# EAGLE board gyro_pcb (EAGLE 7.5.0)
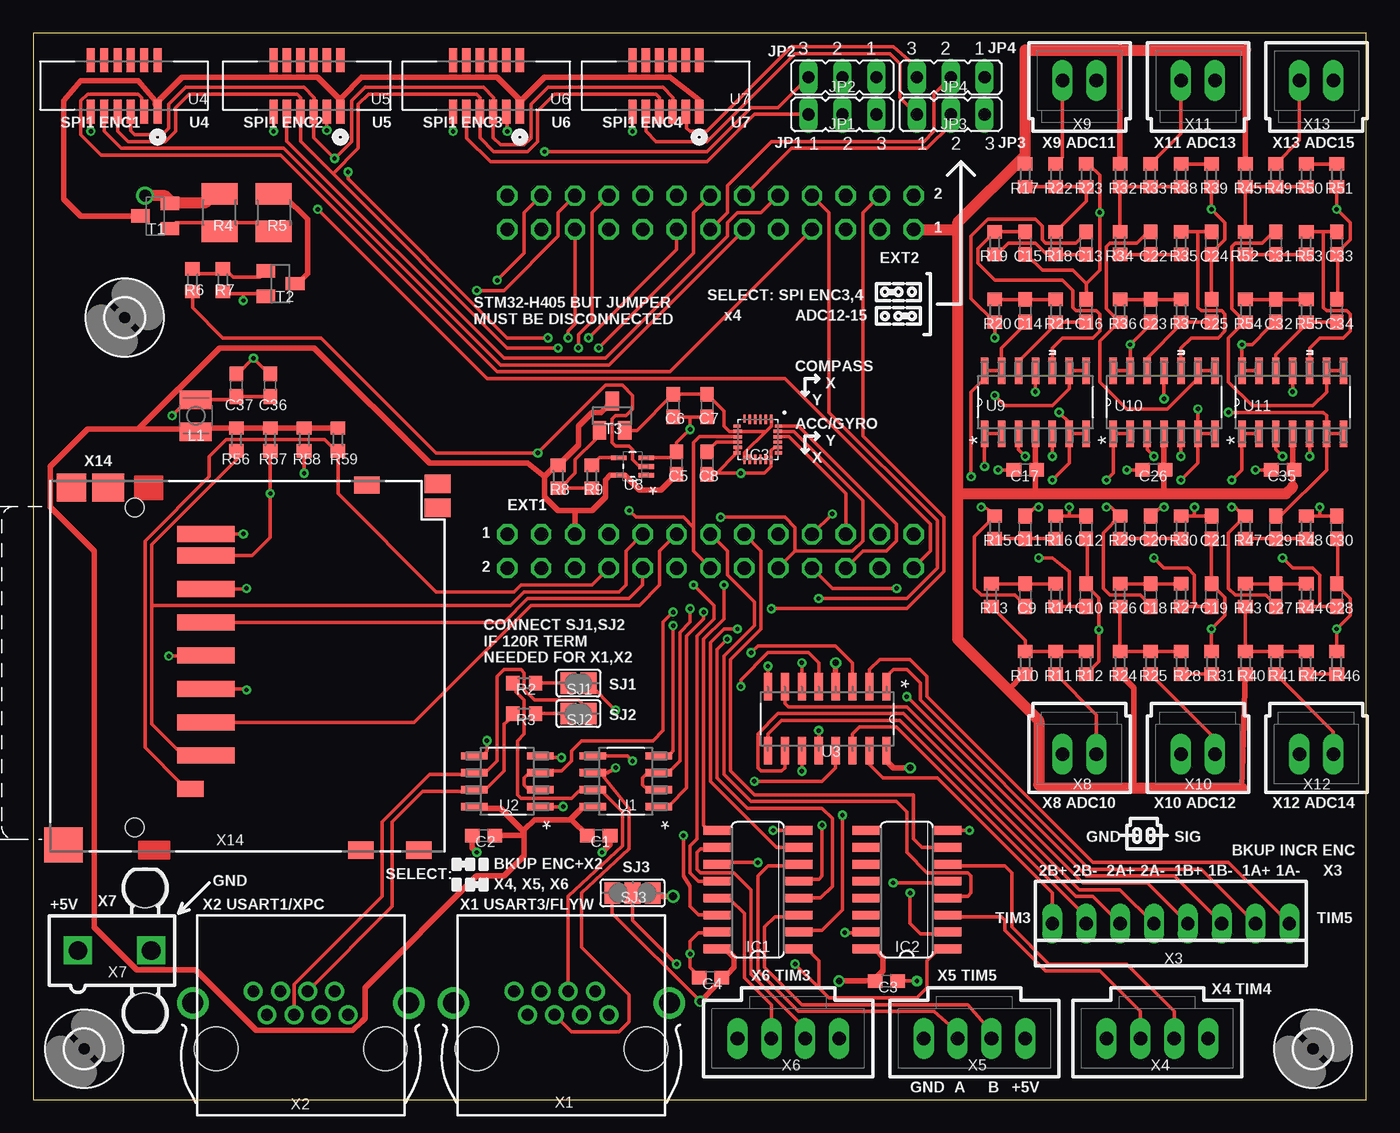
[diagram p0: board, top side]
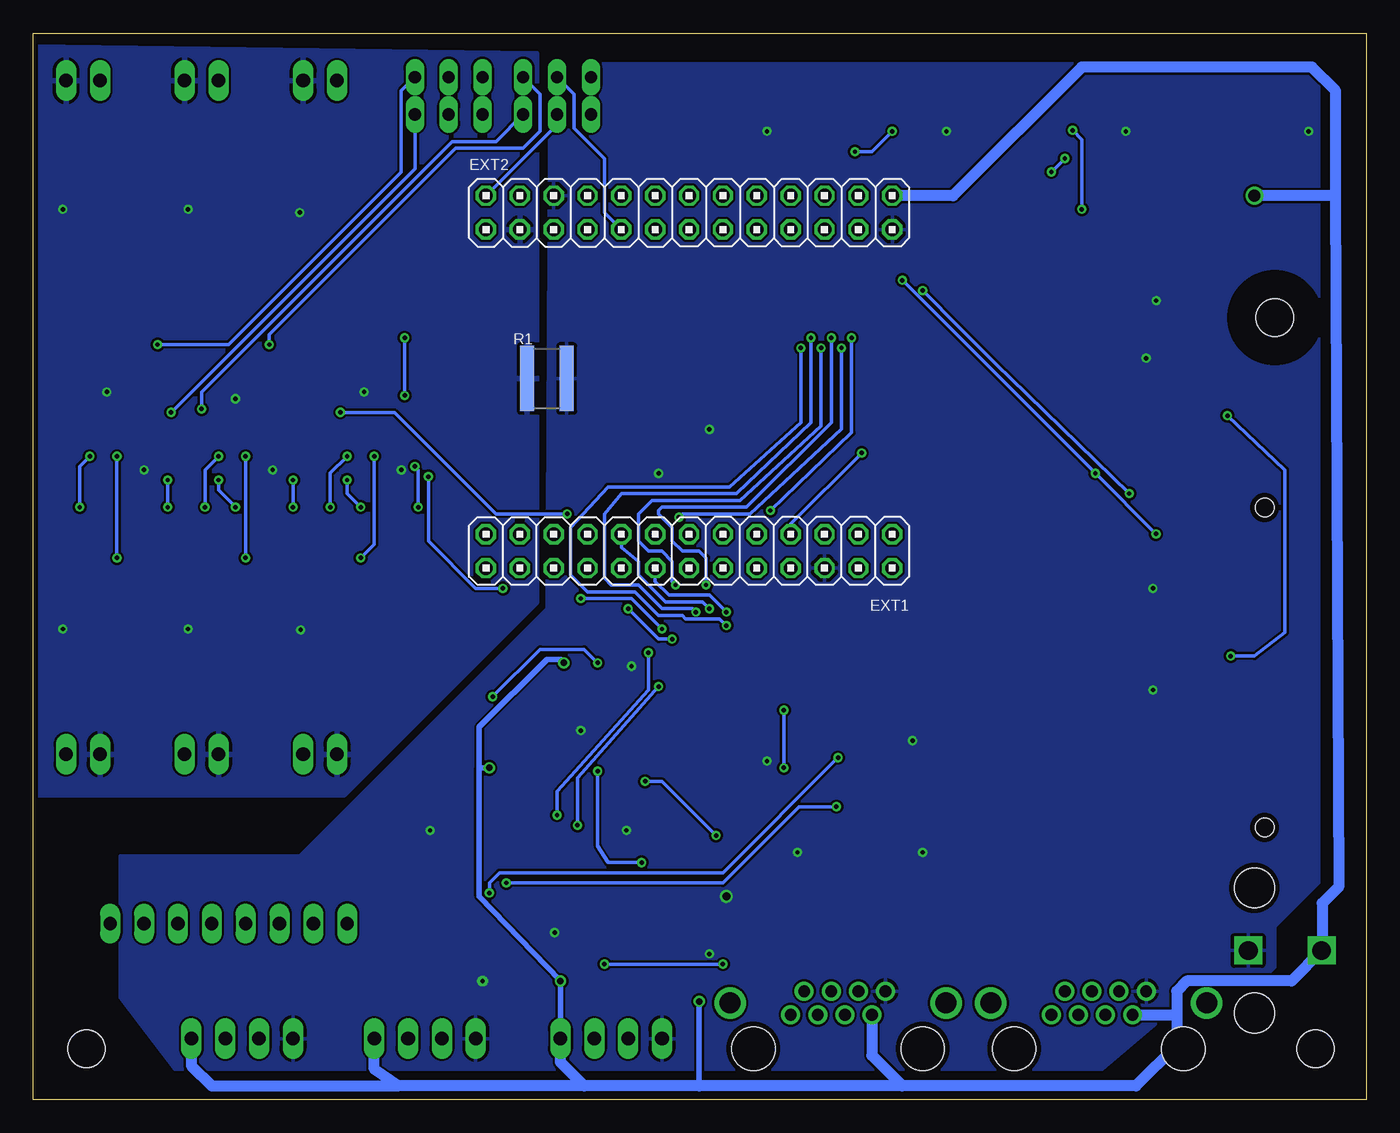
[diagram p1: board, bottom side, seen from below]

Size 100 x 80 mm. Coordinates in mm from the lower left corner, seen from the top.
Outline: 0,0 100,0 100,80 0,80 0,0
Copper layers (1*16): Top 0.0356mm / dielectric 1.5011mm / Bottom 0.0356mm
Design rules "default *": minimum track width 10mil, minimum drill 13mil, track to track 7mil, track to pad 5mil, pad to pad 5mil, via to via 5mil, smd to smd 5mil, copper to edge 15mil, drill to drill 6mil, minimum pad ring 7mil, minimum via ring 7mil, stop-mask expansion 4mil, vias tented up to drill 0mil, thermal gap 10mil

## Footprints (pad centres in the part's own frame; a part is rotated, then mirrored left to right if it is on the bottom)
C0603 = smd 1.1 x 1: 1 -0.85,0; 2 0.85,0
2X13 = drill 1.016 octagon: 1 -15.24,-1.27; 2 -15.24,1.27; 3 -12.7,-1.27; 4 -12.7,1.27; 5 -10.16,-1.27; 6 -10.16,1.27; 7 -7.62,-1.27; 8 -7.62,1.27; 9 -5.08,-1.27; 10 -5.08,1.27; 11 -2.54,-1.27; 12 -2.54,1.27; 13 0,-1.27; 14 0,1.27; 15 2.54,-1.27; 16 2.54,1.27; 17 5.08,-1.27; 18 5.08,1.27; 19 7.62,-1.27; 20 7.62,1.27; 21 10.16,-1.27; 22 10.16,1.27; 23 12.7,-1.27; 24 12.7,1.27; 25 15.24,-1.27; 26 15.24,1.27
2,8 = hole 2.8: 0,0
SO16 = smd 0.66 x 2.032: 1 -4.445,-3.073; 2 -3.175,-3.073; 3 -1.905,-3.073; 4 -0.635,-3.073; 5 0.635,-3.073; 6 1.905,-3.073; 7 3.175,-3.073; 8 4.445,-3.073; 9 4.445,3.073; 10 3.175,3.073; 11 1.905,3.073; 12 0.635,3.073; 13 -0.635,3.073; 14 -1.905,3.073; 15 -3.175,3.073; 16 -4.445,3.073
QFN24-SMALL = smd 0.6 x 0.25: 1 -1.55,1; 6 -1.55,-1; 13 1.55,-1; 18 1.55,1 | smd 0.7 x 0.25: 2 -1.5,0.6; 3 -1.5,0.2; 4 -1.5,-0.2; 5 -1.5,-0.6; 14 1.5,-0.6; 15 1.5,-0.2; 16 1.5,0.2; 17 1.5,0.6 | smd 0.25 x 0.6: 7 -1,-1.55; 12 1,-1.55; 19 1,1.55; 24 -1,1.55 | smd 0.25 x 0.7: 8 -0.6,-1.5; 9 -0.2,-1.5; 10 0.2,-1.5; 11 0.6,-1.5; 20 0.6,1.5; 21 0.2,1.5; 22 -0.2,1.5; 23 -0.6,1.5
JP2 = drill 0.914 long: 1 -2.54,0; 2 0,0; 3 2.54,0
L2825P = smd 1.4 x 2.4: 1 -1.2,0; 2 1.2,0
R1218 = smd 1.05 x 4.9: 1 -1.475,0; 2 1.475,0
R0603 = smd 1 x 1.1: 1 -0.85,0; 2 0.85,0
R1210 = smd 1.6 x 2.7: 1 -1.4,0; 2 1.4,0
SJ = smd 1.168 x 1.6: 1 -0.762,0; 2 0.762,0
SJ_2 = smd 1.168 x 1.6: 1 -1.524,0; 2 0,0; 3 1.524,0
SOT23-BEC = smd 1 x 1.4: B -0.95,-1.1; C 0,1.1; E 0.95,-1.1
SOT23 = smd 1 x 1.4: 1 -0.95,-1.1; 2 0.95,-1.1; 3 0,1.1
SOIC127P600X175-8N = smd 1.981 x 0.559: 1 -2.464,1.905; 2 -2.464,0.635; 3 -2.464,-0.635; 4 -2.464,-1.905; 5 2.464,-1.905; 6 2.464,-0.635; 7 2.464,0.635; 8 2.464,1.905
SOIC127P600X175-16N = smd 2.057 x 0.61: 1 -4.801,8.89; 2 -4.801,7.62; 3 -4.801,6.35; 4 -4.801,5.08; 5 -4.801,3.81; 6 -4.801,2.54; 7 -4.801,1.27; 8 -4.801,0; 9 0,0; 10 0,1.27; 11 0,2.54; 12 0,3.81; 13 0,5.08; 14 0,6.35; 15 0,7.62; 16 0,8.89
MOLEX_52610-0671 = smd 0.61 x 1.803: 1 -5.004,3.861; 2 -3.988,3.861; 3 -2.997,3.861; 4 -2.007,3.861; 5 -0.991,3.861; 6 0,3.861; 20 -5.004,0; 40 -3.988,0; 60 -2.997,0; 80 -2.007,0; 100 -0.991,0; 120 0,0
SOT65P210X110-5N = smd 1.168 x 0.356: 1 -1.041,0.66; 2 -1.041,0; 3 -1.041,-0.66; 4 1.041,-0.66; 5 1.041,0.66
SOIC127P600X175-14N = smd 1.981 x 0.559: 1 -2.362,3.81; 2 -2.362,2.54; 3 -2.362,1.27; 4 -2.362,0; 5 -2.362,-1.27; 6 -2.362,-2.54; 7 -2.362,-3.81; 8 2.362,-3.81; 9 2.362,-2.54; 10 2.362,-1.27; 11 2.362,0; 12 2.362,1.27; 13 2.362,2.54; 14 2.362,3.81
0446200002 = drill 0.889 pad 1.422: 1 3.556,2.54; 2 2.54,4.318; 3 1.524,2.54; 4 0.508,4.318; 5 -0.508,2.54; 6 -1.524,4.318; 7 -2.54,2.54; 8 -3.556,4.318 | drill 1.575 pad 2.286: S@1 -8.103,3.429; S@2 8.103,3.429 | hole 3.251: 6.35,0; -6.35,0
22-23-2081 = drill 1 long: 1 -8.89,0; 2 -6.35,0; 3 -3.81,0; 4 -1.27,0; 5 1.27,0; 6 3.81,0; 7 6.35,0; 8 8.89,0
70543-04 = drill 1.016 long: 1 -3.81,0; 2 -1.27,0; 3 1.27,0; 4 3.81,0
5566-2 = drill 1.4 square: 1 0,-2.75; 2 0,2.75 | hole 3: 4.7,2.29; -4.7,2.29
70543-02 = drill 1.016 long: 1 -1.27,0; 2 1.27,0
SDBMF-009XXBXX2 = smd 1.2 x 4.3: 1 6.7,5.325; 2 4.2,5.325; 3 1.7,5.325; 4 -0.8,5.325; 5 -3.3,5.325; 6 -5.8,5.325; 7 -8.3,5.325; 8 -9.925,5.325 | smd 1.2 x 2: 9 9.2,4.175 | smd 2.1 x 2.4: M1 -13.4,-2 | smd 2.6 x 2.9: M2 13.4,-5.35 | smd 1.3 x 1.9: M3 -13.6,17.4; M4 13.8,16.95; M5 13.8,21.3 | smd 1.4 x 1.95: SW1 -11.9,22.7; SW3 -13.7,22.7 | smd 2.1 x 2.2: SW2 -13.4,-4.75 | hole 1.4: -11.9,0; 12.1,0

## Placement (x,y rotation side)
C1  0.1uF  [C0603]  42.42,19.81 0 top
C2  0.1uF  [C0603]  33.78,19.81 180 top
C3  0.1uF  [C0603]  64.01,8.89 0 top
C4  0.1uF  [C0603]  50.8,9.14 180 top
C5  0.1uF  [C0603]  48.26,47.75 90 top
C6  0.1uF  [C0603]  48.01,52.07 270 top
C7  10nF  [C0603]  50.55,52.07 270 top
C8  0.1uF  [C0603]  50.55,47.75 270 top
C9  39nF  [C0603]  74.42,37.85 270 top
C10  33nF  [C0603]  78.99,37.85 90 top
C11  68nF  [C0603]  74.42,42.93 90 top
C12  10nF  [C0603]  78.99,42.93 270 top
C13  39nF  [C0603]  78.99,64.26 90 top
C14  68nF  [C0603]  74.42,59.18 270 top
C15  33nF  [C0603]  74.42,64.26 270 top
C16  10nF  [C0603]  78.99,59.18 90 top
C17  0.1uF  [C0603]  74.42,47.24 180 top
C18  39nF  [C0603]  83.82,37.85 270 top
C19  33nF  [C0603]  88.39,37.85 90 top
C20  68nF  [C0603]  83.82,42.93 90 top
C21  10nF  [C0603]  88.39,42.93 270 top
C22  39nF  [C0603]  83.82,64.26 90 top
C23  68nF  [C0603]  83.82,59.18 270 top
C24  33nF  [C0603]  88.39,64.26 270 top
C25  10nF  [C0603]  88.39,59.18 90 top
C26  0.1uF  [C0603]  84.07,47.24 180 top
C27  39nF  [C0603]  93.22,37.85 270 top
C28  33nF  [C0603]  97.79,37.85 90 top
C29  68nF  [C0603]  93.22,42.93 90 top
C30  10nF  [C0603]  97.79,42.93 270 top
C31  39nF  [C0603]  93.22,64.26 90 top
C32  68nF  [C0603]  93.22,59.18 270 top
C33  33nF  [C0603]  97.79,64.26 270 top
C34  10nF  [C0603]  97.79,59.18 90 top
C35  0.1uF  [C0603]  93.73,47.24 180 top
C36  22uF  [C0603]  17.78,53.59 90 top
C37  22uF  [C0603]  15.24,53.59 90 top
EXT1  [2X13]  50.8,41.15 180 bottom
EXT2  [2X13]  50.8,66.55 0 bottom
H1  MOUNT-HOLE2.8  [2,8]  3.81,3.81 0 top
H2  MOUNT-HOLE2.8  [2,8]  96.01,3.81 0 top
H3  MOUNT-HOLE2.8  [2,8]  6.86,58.67 0 top
IC1  74AC157D  [SO16]  54.36,15.75 90 top
IC2  74AC157D  [SO16]  65.53,15.75 90 top
IC3  MPU-9250  [QFN24-SMALL]  54.36,49.53 270 top
JP1  [JP2]  60.71,73.91 0 top
JP2  [JP2]  60.71,76.71 180 top
JP3  [JP2]  68.83,73.91 0 top
JP4  [JP2]  68.83,76.71 180 top
L1  CL460nH/2012/1.7R/250mA  [L2825P]  12.19,51.31 90 top
R1  0-ohm  [R1218]  61.47,54.1 0 bottom
R2  120  [R0603]  36.83,31.24 0 top
R3  120  [R0603]  36.83,28.96 0 top
R4  2.7k  [R1210]  13.97,66.55 90 top
R5  270  [R1210]  18.03,66.55 270 top
R6  18k  [R0603]  11.94,61.47 90 top
R7  180k  [R0603]  14.22,61.47 90 top
R8  620k  [R0603]  39.37,46.74 90 top
R9  62k  [R0603]  41.91,46.74 270 top
R10  8.2k/0.1%  [R0603]  74.42,32.77 270 top
R11  10k/0.1%  [R0603]  76.71,32.77 90 top
R12  47k/0.1%  [R0603]  78.99,32.77 90 top
R13  11k/0.1%  [R0603]  71.88,37.85 90 top
R14  11k/0.1%  [R0603]  76.71,37.85 270 top
R15  15k/0.1%  [R0603]  72.14,42.93 270 top
R16  15k/0.1%  [R0603]  76.71,42.93 90 top
R17  8.2k/0.1%  [R0603]  74.42,69.34 90 top
R18  11k/0.1%  [R0603]  76.71,64.26 270 top
R19  11k/0.1%  [R0603]  72.14,64.26 90 top
R20  15k/0.1%  [R0603]  72.14,59.18 90 top
R21  15k/0.1%  [R0603]  76.71,59.18 270 top
R22  10k/0.1%  [R0603]  76.71,69.34 270 top
R23  47k/0.1%  [R0603]  78.99,69.34 270 top
R24  3.3k/0.1%  [R0603]  81.53,32.77 270 top
R25  10k/0.1%  [R0603]  83.82,32.77 90 top
R26  11k/0.1%  [R0603]  81.53,37.85 90 top
R27  11k/0.1%  [R0603]  86.11,37.85 270 top
R28  2.2k/0.1%  [R0603]  86.11,32.77 90 top
R29  15k/0.1%  [R0603]  81.53,42.93 270 top
R30  15k/0.1%  [R0603]  86.11,42.93 90 top
R31  2.7k/0.1%  [R0603]  88.39,32.77 270 top
R32  3.3k/0.1%  [R0603]  81.53,69.34 90 top
R33  10k/0.1%  [R0603]  83.82,69.34 270 top
R34  11k/0.1%  [R0603]  81.53,64.26 270 top
R35  11k/0.1%  [R0603]  86.11,64.26 90 top
R36  15k/0.1%  [R0603]  81.53,59.18 90 top
R37  15k/0.1%  [R0603]  86.11,59.18 270 top
R38  2.2k/0.1%  [R0603]  86.11,69.34 270 top
R39  2.7k/0.1%  [R0603]  88.39,69.34 90 top
R40  3.3k/0.1%  [R0603]  90.93,32.77 270 top
R41  10k/0.1%  [R0603]  93.22,32.77 90 top
R42  2.2k/0.1%  [R0603]  95.5,32.77 90 top
R43  11k/0.1%  [R0603]  90.93,37.85 90 top
R44  11k/0.1%  [R0603]  95.5,37.85 270 top
R45  3.3k/0.1%  [R0603]  90.93,69.34 90 top
R46  2.7k/0.1%  [R0603]  97.79,32.77 270 top
R47  15k/0.1%  [R0603]  90.93,42.93 270 top
R48  15k/0.1%  [R0603]  95.5,42.93 90 top
R49  10k/0.1%  [R0603]  93.22,69.34 270 top
R50  2.2k/0.1%  [R0603]  95.5,69.34 270 top
R51  2.7k/0.1%  [R0603]  97.79,69.34 90 top
R52  11k/0.1%  [R0603]  90.93,64.26 270 top
R53  11k/0.1%  [R0603]  95.5,64.26 90 top
R54  15k/0.1%  [R0603]  90.93,59.18 90 top
R55  15k/0.1%  [R0603]  95.5,59.18 270 top
R56  33k  [R0603]  15.24,49.53 90 top
R57  33k  [R0603]  17.78,49.53 90 top
R58  33k  [R0603]  20.32,49.53 90 top
R59  33k  [R0603]  22.86,49.53 90 top
SJ1  [SJ]  40.89,31.24 0 top
SJ2  [SJ]  40.89,28.96 0 top
SJ3  [SJ_2]  44.96,15.49 180 top
T1  BC808  [SOT23-BEC]  9.14,66.29 90 top
T2  BC848  [SOT23]  18.54,61.21 270 top
T3  BC848  [SOT23]  43.43,51.31 0 top
U1  SN65HVD10D  [SOIC127P600X175-8N]  44.45,23.88 180 top
U2  SN65HVD10D  [SOIC127P600X175-8N]  35.56,23.88 180 top
U3  AM26C32QD  [SOIC127P600X175-16N]  55.12,26.16 270 top
U4  52610-0671  [MOLEX_52610-0671]  4.32,77.98 180 top
U5  52610-0671  [MOLEX_52610-0671]  18.03,77.98 180 top
U6  52610-0671  [MOLEX_52610-0671]  31.5,77.98 180 top
U7  52610-0671  [MOLEX_52610-0671]  44.96,77.98 180 top
U8  SN74AUP1T04DCKR  [SOT65P210X110-5N]  44.96,47.5 180 top
U9  MCP6004-E/SL  [SOIC127P600X175-14N]  75.18,52.32 90 top
U10  MCP6004-E/SL  [SOIC127P600X175-14N]  84.84,52.32 90 top
U11  MCP6004-E/SL  [SOIC127P600X175-14N]  94.49,52.32 90 top
X1  0446200002  [0446200002]  39.62,3.81 0 top
X2  0446200002  [0446200002]  20.07,3.81 0 top
X3  22-23-2081  [22-23-2081]  85.34,13.21 180 top
X4  C-GRID-04-70543  [70543-04]  84.33,4.57 180 top
X5  C-GRID-04-70543  [70543-04]  70.61,4.57 180 top
X6  C-GRID-04-70543  [70543-04]  56.64,4.57 180 top
X7  5566-2  [5566-2]  6.1,11.18 270 top
X8  C-GRID-02-70543  [70543-02]  78.49,25.91 180 top
X9  C-GRID-02-70543  [70543-02]  78.49,76.45 0 top
X10  C-GRID-02-70543  [70543-02]  87.38,25.91 180 top
X11  C-GRID-02-70543  [70543-02]  87.38,76.45 0 top
X12  C-GRID-02-70543  [70543-02]  96.27,25.91 180 top
X13  C-GRID-02-70543  [70543-02]  96.27,76.45 0 top
X14  SDBMF  [SDBMF-009XXBXX2]  7.62,32.51 270 top

## Library data of the parts
C1-C37 L1 R1-R59 = rcl
EXT1 EXT2 = pinhead
H1-H3 = holes
IC1 IC2 = 74xx-eu
IC3 = invensense
JP1-JP4 SJ1-SJ3 = jumper
T1-T3 = transistor
U1 U2 = Texas Instruments_By_element14_Batch_1; MPN: SN65HVD10D; OC_FARNELL: 1207267; OC_NEWARK: 72K9420; PACKAGE: SOIC-8; SUPPLIER: Texas Instruments
U3 = Texas Instruments_By_element14_Batch_1; MPN: AM26C32QD; OC_FARNELL: -; OC_NEWARK: 50R9732; PACKAGE: SOIC-16; SUPPLIER: Texas Instruments
U4-U7 = Molex_By_element14_Batch_1; MPN: 52610-0671; OC_FARNELL: 1079958; OC_NEWARK: 07P8569; PACKAGE: SOCKET FFC/FPC, 06 way; SUPPLIER: Molex
U8 = Texas Instruments_By_element14_Batch_1; MPN: SN74AUP1T04DCKR; OC_FARNELL: -; OC_NEWARK: 74R6552; PACKAGE: SC70-5; SUPPLIER: Texas Instruments
U9-U11 = Microchip_By_element14_Batch_1; MPN: MCP6004-E/SL; OC_FARNELL: 1332122; OC_NEWARK: 34M7475; PACKAGE: SOIC14; SUPPLIER: Microchip
X1 X2 = con-molex; MF: MOLEX; MPN: 0446200002; OC_FARNELL: 9251910
X3 = con-molex; MF: MOLEX; MPN: 22-23-2081; OC_FARNELL: 1756826; OC_NEWARK: 01C7592
X4-X6 X8-X13 = con-molex; OC_FARNELL: unknown; OC_NEWARK: unknown
X7 = con-molex; OC_FARNELL: 1822072; OC_NEWARK: unknown
X14 = farnell

## Nets
5VUSB: EXT2.23
+3V3: C1.1 C2.1 C5.1 EXT1.5 L1.1 R8.2 R56.2 R57.2 R58.2 R59.2 T3.3 U1.8 U2.8 U8.5
+3V3(DISC): EXT2.5
+3V3A: C17.1 C26.1 C35.1 EXT2.1 R10.2 R17.2 R24.2 R32.2 R40.2 R45.2 U9.4 U10.4 U11.4
+5V: C3.1 C4.1 EXT2.26 IC1.16 IC2.16 R4.2 SJ3.3 T1.E U3.4 U3.16 X1.7 X2.7 X4.1 X5.1 X6.1 X7.1
ENC1_CHA+: U3.1 X3.2
ENC1_CHA-: U3.2 X3.1
ENC1_CHB+: U3.7 X3.4
ENC1_CHB-: U3.6 X3.3
ENC2_CHA+: U3.9 X3.6
ENC2_CHA-: U3.10 X3.5
ENC2_CHB+: U3.15 X3.8
ENC2_CHB-: U3.14 X3.7
ENC_PWR: T1.C U4.1 U5.1 U6.1 U7.1
FLYWHEEL_RS-485_A: SJ1.2 U1.6 X1.5
FLYWHEEL_RS-485_B: R2.1 U1.7 X1.4
FRONT_WHEEL_ENC_A: IC1.13 X6.3
FRONT_WHEEL_ENC_B: IC1.10 X6.2
GND: C1.2 C2.2 C3.2 C4.2 C5.2 C6.2 C7.2 C8.2 C36.2 C37.2 EXT1.6 EXT2.6 EXT2.25 IC1.8 IC1.15 IC2.8 IC2.15 IC3.11 IC3.12 IC3.18 IC3.20 R1.2 R7.1 SJ3.1 T2.2 U1.5 U2.5 U3.8 U3.12 U4.6 U5.6 U6.6 U7.6 U8.3 X1.8 X2.8 X4.4 X5.4 X6.4 X7.2 X14.3 X14.6
GNDA: C10.2 C12.2 C15.2 C16.2 C17.2 C19.2 C21.2 C24.2 C25.2 C26.2 C28.2 C30.2 C33.2 C34.2 C35.2 EXT2.3 R1.1 R12.1 R23.1 R31.1 R39.1 R46.1 R51.1 U9.11 U10.11 U11.11 X8.2 X9.2 X10.2 X11.2 X12.2 X13.2
IMU_PWR: C6.1 C7.1 IC3.1 IC3.8 IC3.13 T3.2
INCR_ENC1_CHA: IC1.2 U3.3
INCR_ENC1_CHB: IC1.5 U3.5
INCR_ENC2_CHA: IC1.11 U3.11
INCR_ENC2_CHB: IC1.14 U3.13
N$1: C8.1 IC3.10
N$2: R8.1 R9.2 T3.1
N$3: R4.1 R5.2 T1.B
N$4: R5.1 T2.3
N$5: R6.2 R7.2 T2.1
N$6: R28.1 R31.2
N$7: C18.1 R26.2 R27.1
N$8: C19.1 R27.2 U10.3
N$9: C18.2 R29.1 U10.1 U10.2
N$10: R24.1 R25.2 R26.1 R28.2
N$11: C22.1 R34.2 R35.1
N$12: C24.1 R35.2 U10.10
N$13: C22.2 R36.1 U10.8 U10.9
N$14: C23.1 R36.2 R37.1
N$15: R10.1 R11.2 R12.2 R13.1
N$16: R22.1 X9.1
N$17: R32.1 R33.2 R34.1 R38.2
N$18: C25.1 R37.2 U10.12
N$19: C36.1 C37.1 L1.2 X14.4
N$20: R2.2 SJ1.1
N$21: C9.1 R13.2 R14.1
N$22: C21.1 R30.2 U10.5
N$23: C20.1 R29.2 R30.1
N$24: R3.2 SJ2.1
N$25: C27.1 R43.2 R44.1
N$26: C28.1 R44.2 U11.3
N$27: C27.2 R47.1 U11.1 U11.2
N$28: C10.1 R14.2 U9.3
N$29: C9.2 R15.1 U9.1 U9.2
N$31: C12.1 R16.2 U9.5
N$32: C13.1 R18.2 R19.1
N$33: C15.1 R19.2 U9.10
N$34: C13.2 R20.1 U9.8 U9.9
N$35: C14.1 R20.2 R21.1
N$36: C16.1 R21.2 U9.12
N$37: R9.1 U8.4
N$38: C31.1 R52.2 R53.1
N$39: C33.1 R53.2 U11.10
N$40: C31.2 R54.1 U11.8 U11.9
N$41: C32.1 R54.2 R55.1
N$42: R49.1 X13.1
N$43: C34.1 R55.2 U11.12
N$44: C30.1 R48.2 U11.5
N$45: R17.1 R18.1 R22.2 R23.2
N$46: C29.1 R47.2 R48.1
N$47: R41.1 X12.1
N$48: C11.1 R15.2 R16.1
N$49: IC1.1 IC2.1 SJ3.2
N$50: R25.1 X10.1
N$53: R11.1 X8.1
N$58: R38.1 R39.2
N$59: R40.1 R41.2 R42.2 R43.1
N$60: R42.1 R46.2
N$61: R45.1 R49.2 R50.2 R52.1
N$62: R50.1 R51.2
N$63: R33.1 X11.1
PA0/TIM5_CH1/ENC1_CHA: EXT2.4 IC1.4
PA1/TIM5_CH2/ENC1_CHB: EXT2.8 IC1.7
PA2/SPI1_ENC1_STA: EXT2.7 U4.2
PA3/SPI1_ENC2_NSS: EXT2.10 U5.5
PA4/SPI1_ENC1_NSS: EXT2.11 U4.5
PA5/SPI1_SCK: EXT1.18 IC3.23 U4.4 U5.4 U6.4 U7.4
PA6/SPI1_MISO: EXT1.14 IC3.9 U4.3 U5.3 U6.3 U7.3
PA7/SPI1_MOSI: EXT1.22 IC3.24
PA8/TIM1_CH1/M1_PWM: EXT1.2
PA9/TIM1_CH2/M2_PWM: EXT1.4
PA10/SPI1_PWR: EXT1.7 R6.1 U8.2
PB0/SPI1_IMU_NSS: EXT1.21 IC3.22
PB1/SPI1_ENC2_STA: EXT1.26 U5.2
PB5: EXT1.12
PB6/USART1_TX/TIM4_CH1: EXT1.13 IC2.4
PB6/USART1_TX/XPC_RS-485_D: IC2.2 U2.4
PB7/USART1_RX/TIM4_CH2: EXT1.15 IC2.7
PB7/USART1_RX/XPC_RS-485_R: IC2.5 U2.1
PB8/XPC_RS-485_DE: EXT1.16 U2.2 U2.3
PB9/FLYW_RS-485_DE: EXT1.17 U1.2 U1.3
PB10/USART3_TX/FLYW_RS-485_D: EXT2.14 U1.4
PB11/USART3_TX/FLYW_RS-485_R: EXT2.15 U1.1
PB12/M1_EN: EXT2.17
PB13/M2_EN: EXT2.16
PB14/M1_RDY: EXT2.18
PB15/M2_RDY: EXT2.19
PC0/ADC10/M1_CURRENT: C11.2 EXT1.19 U9.6 U9.7
PC1/ADC11/M2_CURRENT: C14.2 EXT1.20 U9.13 U9.14
PC2/ADC12/RIDER_TORQUE: C20.2 JP1.3 U10.6 U10.7
PC2/SPI1_ENC3_NSS: JP1.1 U6.5
PC2/SPI1_ENC3_NSS/ADC12: EXT2.2 JP1.2
PC3/ADC13/PEDAL_SPEED: C23.2 JP2.1 U10.13 U10.14
PC3/SPI1_ENC3_STA: JP2.3 U6.2
PC3/SPI1_ENC3_STA/ADC13: EXT2.9 JP2.2
PC4/ADC14/FRONT_WHEEL_SPEED: C29.2 JP3.3 U11.6 U11.7
PC4/SPI1_ENC4_NSS: JP3.1 U7.5
PC4/SPI1_ENC4_NSS/ADC14: EXT2.12 JP3.2
PC5/ADC15/REAR_WHEEL_SPEED: C32.2 JP4.1 U11.13 U11.14
PC5/SPI1_ENC4_STA: JP4.3 U7.2
PC5/SPI1_ENC4_STA/ADC15: EXT2.13 JP4.2
PC6/TIM3_CH1/ENC2_CHA: EXT2.20 IC1.9
PC7/TIM3_CH2/ENC2_CHB: EXT2.21 IC1.12
PC8/SD_D0: EXT2.22 R57.1 X14.7
PC9/SD_D1: EXT2.24 R58.1 X14.8
PC10/SD_D2: EXT1.8 R59.1 X14.9
PC11/SD_D3: EXT1.9 R56.1 X14.1
PC12/SD_CLK: EXT1.10 X14.5
PC13: EXT1.24
PD2/SD_CMD: EXT1.11 X14.2
PEDAL_ENC_A: IC2.3 X4.3
PEDAL_ENC_B: IC2.6 X4.2
REAR_WHEEL_ENC_A: IC1.6 X5.3
REAR_WHEEL_ENC_B: IC1.3 X5.2
RST: EXT1.25
USBDM: EXT1.1
USBDP: EXT1.3
VBAT: EXT1.23
XPC_RS-485_A: SJ2.2 U2.6 X2.5
XPC_RS-485_B: R3.1 U2.7 X2.4

## Tracks (layer width: path | path; a pad name or v marks a point on that pad's centre or on a via)
+3V3
  Top 0.254: 33.17,21.89 U2.8 33.22,21.84 | 4.57,12.95 4.57,12.92
  Top 0.406: 38.35,46.74 39.37,47.75 R8.2 40.89,49.11 40.89,50.55 41.91,51.56 42.59,51.56 T3.3 | 38.35,46.74 38.35,45.21 39.37,44.2 40.64,44.2 | R59.2 R58.2 R57.2 R56.2 12.46,50.38 L1.1 11.36,50.11 11.18,50.29 7.87,50.29 | 40.27,20.99 37.59,20.99 36.83,20.23 36.83,20.07 | 40.27,20.99 41.17,21.89 U1.8 | 36.83,19.81 36.83,20.07 | 40.27,20.99 40.39,20.99 C1.1 | 36.83,20.07 35.05,21.84 33.22,21.84 | C2.1 36.83,19.81 | C5.1 47.08,45.72 45.47,45.72 44.35,46.84 U8.5 43.28,46.84 42.93,46.48 42.93,45.21 41.91,44.2 40.64,44.2 | 36.83,19.81 36.83,18.29 35.31,16.76 33.27,16.76 24.89,8.38 24.89,6.1 24.62,5.83 24.61,5.83 23.96,5.18 16.7,5.18 12.17,9.72 7.77,9.72 4.57,12.92 | 4.57,12.95 4.57,41.15 1.27,44.45 1.27,47.5 4.06,50.29 7.87,50.29 | 7.87,50.29 13.97,56.39 21.08,56.39 29.72,47.75 37.08,47.75 38.35,46.74 | EXT1.5 40.64,44.2
+3V3A
  Top 0.254: R32.2 81.46,70.17 81.53,70.17 | 75.18,49.87 75.2,49.87 U9.4 | U10.4 84.91,49.87 84.84,49.78 | U11.4 94.63,49.87 94.49,49.78 | C17.1 75.18,47.24 | C26.1 84.84,47.24 | C35.1 94.58,47.08 94.49,46.99 | 69.09,65.28 69.34,65.79
  Top 0.406: 81.53,32 R24.2 82.55,30.9 82.55,23.37 | 94.49,49.78 94.49,46.99 94.49,45.97 | 90.93,70.1 R45.2 90.93,78.74 | 84.84,49.78 84.84,47.24 84.84,45.47 | 75.18,50.04 U9.4 75.18,49.87 75.18,47.24 75.18,45.47 | 81.53,70.1 81.53,70.17 R32.2 81.53,78.74 | R17.2 74.33,70.1 74.42,70.87 | R40.2 90.68,23.37 | R10.2 74.33,31.92 73.15,30.73
  Top 0.813: 69.34,45.47 69.34,34.54 73.15,30.73 75.44,28.45 75.44,23.62 75.69,23.37 82.55,23.37 90.68,23.37 | 69.34,45.47 75.18,45.47 84.84,45.47 93.98,45.47 94.49,45.97 | 90.93,78.74 81.53,78.74 74.42,78.74 74.42,70.87 69.34,65.79 69.34,45.47 | EXT2.1 69.09,65.28
+5V  (via drill 0.48, 0.89)
  Top 0.254: 10.41,67.31 10.38,67.17 T1.E 10.81,67.39 10.81,67.31 | R4.2 13.83,67.82 13.46,67.82 | 43.52,15.52 SJ3.3 43.43,13.97 v50.04,7.37 | 51.38,11.23 IC1.16 | 60.39,30.82 U3.4
  Top 0.406: C4.1 51.38,9.39 51.38,8.71 v50.04,7.37 | C4.1 51.82,9.14 | v60.45,8.89 C3.1 63.16,9.06 63.75,9.65 63.75,10.67 63.25,11.18 62.59,11.18 IC2.16 | 51.38,11.23 52.02,11.23 52.58,10.67 52.58,9.91 52.07,9.4 51.9,9.4 C4.1 | v60.2,32.77 U3.4 | v65.79,24.89 64.52,24.89 64.01,25.4 U3.16
  Top 0.813: 10.16,67.31 10.41,67.31 | 10.41,67.31 10.81,67.31 12.95,67.31 13.46,67.82 | 10.41,67.31 9.91,67.82 v8.38,67.82
  Bottom 0.254: 3.3,11.44 3.45,11.44 X7.1
  Bottom 0.406: X6.1 v60.45,8.89 66.55,15.24 66.55,24.89 | v50.04,7.37 50.04,1.02 | v60.2,32.77 60.45,33.02 61.47,33.02 66.55,27.94 66.55,24.89 | 66.55,24.89 v65.79,24.89
  Bottom 0.813: 58.67,1.02 60.45,2.79 X6.1 | 34.8,1.02 50.04,1.02 58.67,1.02 | X4.1 88.14,2.54 86.61,1.02 72.64,1.02 | X5.1 74.42,2.29 72.64,1.02 | 58.67,1.02 72.64,1.02 | X1.7 37.08,3.3 34.8,1.02 | 34.8,1.02 17.27,1.02 14.22,4.06 14.22,6.35 | X7.1 5.59,8.89 13.46,8.89 14.22,8.13 14.22,6.35 | 2.29,67.82 2.03,16 3.3,14.73 3.3,11.44 3.3,11.18 | 2.29,67.82 2.29,75.69 4.06,77.47 21.34,77.47 30.99,67.82 EXT2.26 | X2.7 14.22,6.35 | 2.29,67.82 v8.38,67.82
ENC1_CHA+
  Top 0.254: U3.1 64.01,31.75 64.52,32.26 65.53,32.26 66.55,31.24 66.55,29.97 79.25,17.27 87.63,17.27 X3.2
ENC1_CHA-
  Top 0.254: U3.2 62.74,32.26 63.5,33.02 65.79,33.02 67.06,31.75 67.06,30.23 79.5,17.78 89.66,17.78 X3.1
ENC1_CHB+
  Top 0.254: U3.7 56.39,29.72 56.64,29.46 65.53,29.46 78.74,16.26 83.57,16.26 X3.4
ENC1_CHB-  (via drill 0.33)
  Top 0.254: v57.66,32.77 U3.6 | v65.53,30.23 78.99,16.76 85.6,16.76 X3.3
  Bottom 0.254: v65.53,30.23 61.98,33.78 58.67,33.78 v57.66,32.77
ENC2_CHA+
  Top 0.254: U3.9 55.12,27.43 56.13,28.45 65.02,28.45 78.23,15.24 79.5,15.24 X3.6
ENC2_CHA-
  Top 0.254: U3.10 56.39,24.89 56.13,24.64 54.61,24.64 54.36,24.89 54.36,27.43 55.88,28.96 65.28,28.96 78.49,15.75 81.53,15.75 X3.5
ENC2_CHB+
  Top 0.254: X3.8 76.45,15.49 67.82,24.13 63.75,24.13 62.74,25.15 U3.15
ENC2_CHB-
  Top 0.254: U3.14 61.47,27.43 61.98,27.94 64.77,27.94 78.99,13.72 X3.7
ENC_PWR
  Top 0.254: 9.32,74.5 U4.1
  Top 0.406: T1.C 3.56,66.29 2.29,67.56 2.29,74.93 3.56,76.45 7.87,76.45 9.14,74.93 9.14,74.68 9.32,74.5 | U4.1 9.4,74.19 9.4,74.93 11.18,76.71 21.34,76.71 22.86,75.18 23.11,75.18 | 23.04,74.75 U5.1 23.11,74.19 23.11,75.18 | 23.11,75.18 24.64,76.71 34.8,76.71 36.5,75.01 U6.1 36.58,74.19 36.58,74.93 38.35,76.71 47.75,76.71 49.96,75.01 U7.1
FLYWHEEL_RS-485_A  (via drill 0.33)
  Top 0.254: 42.55,24.51 43.05,24.51 v43.69,24.89 | v43.69,29.21 SJ1.2 | U1.6 42.55,24.51 | 42.55,24.51 44.7,21.84 44.7,18.8 41.15,15.49 41.15,11.43 44.7,7.87 44.7,5.84 43.94,5.08 40.39,5.08 X1.5
  Bottom 0.254: v43.69,24.89 v43.69,29.21
FLYWHEEL_RS-485_B
  Top 0.254: U1.7 42.11,23.11 42.67,23.11 44.2,21.59 44.2,19.05 40.13,15.24 X1.4 | R2.1 36.23,30.82 36.23,30.57 36.83,29.97 36.83,27.43 36.32,26.92 36.32,22.86 36.58,22.61 40.39,22.61 40.89,23.11 41.86,23.11 U1.7 | 41.86,23.37 U1.7
FRONT_WHEEL_ENC_A
  Top 0.254: X6.3 55.37,7.11 53.34,9.14 53.34,13.97 52.32,14.99 51.41,14.99 IC1.13
FRONT_WHEEL_ENC_B
  Top 0.254: X6.2 57.91,5.33 53.85,9.4 53.85,15.75 52.58,17.02 50.04,17.02 49.78,17.27 49.78,18.54 50.04,18.8 51.16,18.8 IC1.10 51.41,18.8
GND  (via drill 0.33, 0.33 pad 0.25, 0.33 pad 0.81, 0.6)
  Top 0.254: 15.77,60.48 14.28,60.48 R7.1 14.06,60.48 | T2.2 17.3,60.48 15.77,60.48 | IC1.15 51.17,12.52 49.91,12.52 49.28,11.89 v49.28,10.92 49.28,9.91 49.95,9.23 C4.2 | v60.88,12.52 62.4,12.52 IC2.15 | C3.2 v66.29,8.89 | U3.12 v58.93,27.69 | U3.8 v55.12,32.51 | IC2.8 v70.23,20.19 | IC1.8 v55.5,20.19 | C37.2 15.33,54.44 v16.51,55.63 17.69,54.44 C36.2 | IC3.20 55.59,48.93 55.36,48.69 IC3.18 55.36,47.48 54.86,46.99 v53.09,46.99 50.63,46.99 C8.2 51.18,46.9 IC3.12 52.81,48.88 IC3.11 | C7.2 49.28,51.22 | 49.28,51.22 C6.2 | 49.28,51.22 v49.28,50.29 48.26,49.28 C5.2 47.82,48.16 U8.3 | U1.5 44.58,25.78 v44.96,25.4 | U2.5 33.66,25.78 34.04,26.16 v34.04,26.92 | 15.77,60.48 15.75,60.45 v15.75,59.94 | X14.3 15.92,30.81 v16,30.73 | X14.6 15.96,38.31 v16,38.35 | U7.6 v44.96,72.64 | U6.6 v31.5,72.64 | U5.6 v18.03,72.64 | U4.6 v4.32,72.64
  Top 0.406: SJ3.1 46.48,15.24 v48.01,15.24 | C1.2 43.27,19.14 v42.67,18.54 | C2.2 32.93,18.88 v33.27,18.54
  pour Bottom: 61.47,36.83 61.21,77.72 3.56,77.72 3.56,16.26 6.86,12.95 6.86,9.91 7.87,8.89 11.94,8.89 19.81,2.29 89.41,2.29 91.95,5.59 93.47,7.62 93.47,18.29 80.01,18.29
GNDA  (via drill 0.33, 0.33 pad 0.25)
  Top 0.254: C25.2 88.37,60.24 88.37,63.26 C24.2 88.39,63.5 89.41,64.52 89.41,65.79 v88.39,66.8 R39.1 88.3,68.49 | 88.37,38.48 C19.2 | C21.2 88.37,41.94 88.37,38.7 C19.2 | 97.87,38.7 97.87,41.94 C30.2 | 97.87,38.7 C28.2 | R12.1 79.08,32 79.95,32.87 v79.95,35.24 79.95,37.62 79.08,38.48 C10.2 79.08,38.7 79.08,41.94 C12.2 | C34.2 97.87,60.24 97.87,63.26 C33.2 97.79,63.5 98.81,64.52 98.81,65.79 v97.79,66.8 R51.1 | C17.2 v72.39,47.24 | C26.2 v82.04,47.24 | C35.2 v91.69,47.24 | U10.11 v84.84,52.58 | 78.91,60.03 C16.2 78.99,61.21 | U9.11 v75.18,53.09 | U11.11 v94.49,53.09 | C19.2 89.41,37.68 89.41,36.32 v88.39,35.31 R31.1 | 97.87,38.7 97.87,38.53 98.81,37.59 98.81,36.32 v97.79,35.31 R46.1 | C15.2 74.51,63.41 75.69,62.23 77.98,62.23 78.99,61.21 | R23.1 79.16,70.19 80.01,69.34 v80.01,66.55 80.01,62.23 78.99,61.21
  pour Bottom: 62.23,78.49 100.33,78.99 100.84,22.86 76.71,22.86 62.23,37.34
IMU_PWR
  Top 0.254: 54.96,50.13 IC3.8 52.23,50.13 51.82,50.55 51.82,51.65 C7.1 C6.1 45.29,50.21 T3.2 | 54.96,50.13 55.37,50.55 55.37,51.06 IC3.1 | IC3.13 53.36,48.53 54.96,50.13
INCR_ENC1_CHA  (via drill 0.33)
  Top 0.254: U3.3 61.47,32.77 60.2,34.04 54.36,34.04 v53.85,33.53 | v60.71,21.34 60.71,14.22 59.18,12.7 57.56,12.7 IC1.2
  Bottom 0.254: v53.85,33.53 53.85,30.73 60.71,23.11 v60.71,21.34
INCR_ENC1_CHB  (via drill 0.33)
  Top 0.254: U3.5 58.93,32.77 58.17,33.53 55.12,33.53 53.09,31.5 v53.09,30.99 | IC1.5 57.56,16.51 58.93,16.51 59.18,16.76 v59.18,20.57
  Bottom 0.254: v53.09,30.99 59.18,24.13 v59.18,20.57
INCR_ENC2_CHA  (via drill 0.33)
  Top 0.254: U3.11 v57.66,24.64 | IC1.11 51.16,17.78 v54.36,17.78
  Bottom 0.254: v54.36,17.78 56.9,17.78 57.66,19.05 v57.66,24.64
INCR_ENC2_CHB  (via drill 0.33)
  Top 0.254: v54.1,23.88 59.18,23.88 60.2,24.89 U3.13 | IC1.14 49.91,13.84 49.28,14.48 49.28,16 48.77,16.76 v48.77,19.81
  Bottom 0.254: v54.1,23.88 52.83,23.88 v48.77,19.81
N$1
  Top 0.254: IC3.10 51.27,49.33 C8.1
N$2
  Top 0.254: 42.67,50.02 T3.1 42.16,49.89 42.16,49.53 40.64,48.01 40.64,46.99 39.62,45.97 39.37,45.97 R8.1 R9.2
N$3
  Top 0.254: T1.B 10.69,65.79 12.95,65.79 13.59,65.15 R4.1 14.61,65.79 17.02,65.79 17.66,65.15 R5.2
N$4
  Top 0.406: T2.3 19.81,61.21 20.57,61.98 20.57,66.04 18.8,67.82 18.16,67.82 R5.1
N$5
  Top 0.254: T2.1 17,61.72 14.99,61.72 14.39,62.32 R7.2 13.88,61.98 12.19,61.98 11.94,62.23 R6.2
N$6
  Top 0.254: R31.2 R28.1
N$7
  Top 0.254: R27.1 C18.1 R26.2
N$8  (via drill 0.33)
  Top 0.254: C19.1 87.38,37 | 87.38,37 R27.2 | U10.3 83.57,48.77 v84.07,48.26 | v84.07,40.64 84.84,39.88 86.61,39.88 87.12,39.37 87.12,37.25 87.38,37
  Bottom 0.254: v84.07,48.26 v84.07,40.64
N$9  (via drill 0.33)
  Top 0.254: C18.2 83.82,37.08 83.06,37.85 80.77,37.85 80.26,38.35 80.26,42.51 R29.1 80.86,44.45 v80.52,44.45 | v80.52,46.48 81.03,46.99 U10.1 U10.2
  Bottom 0.254: v80.52,44.45 v80.52,46.48
N$10
  Top 0.254: R28.2 R25.2 R24.1 R26.1
N$11
  Top 0.254: R35.1 C22.1 R34.2
N$12
  Top 0.254: R35.2 87.38,65.11 | 87.38,65.11 C24.1 | U10.10 86.11,56.39 86.87,57.15 88.9,57.15 89.41,57.66 89.41,58.93 89.15,59.18 87.63,59.18 87.38,59.44 87.38,65.11
N$13
  Top 0.254: U10.8 U10.9 87.38,54.1 85.09,51.82 82.04,51.82 80.01,53.85 80.01,56.9 81.45,58.33 R36.1 80.52,59.35 80.52,64.01 80.77,64.26 82.8,64.26 83.65,65.11 C22.2
N$14
  Top 0.254: R36.2 C23.1 R37.1
N$15
  Top 0.254: R12.2 R11.2 R10.1 74.42,34.46 R13.1
N$16
  Top 0.254: X9.1 77.22,70.7 R22.1
N$17
  Top 0.254: R38.2 R33.2 R32.1 R34.1
N$18
  Top 0.254: C25.1 R37.2 86.11,58.17 83.57,55.63 U10.12
N$19  (via drill 0.33)
  Top 0.254: C36.1 C37.1 15,52.51 L1.2 11.61,52.51 v10.41,51.31 | v10.16,33.27 12.91,33.27 X14.4
  Bottom 0.254: v10.41,51.31 6.1,47.24 6.1,35.05 8.38,33.27 v10.16,33.27
N$20
  Top 0.254: R2.2 SJ1.1
N$21
  Top 0.254: R14.1 C9.1 R13.2
N$22  (via drill 0.33)
  Top 0.254: R30.2 87.12,43.78 | 87.12,43.78 C21.1 | U10.5 v86.11,48.26 | v87.12,44.45 87.12,43.78
  Bottom 0.254: v86.11,48.26 87.12,47.24 v87.12,44.45
N$23
  Top 0.254: R29.2 C20.1 R30.1
N$24
  Top 0.254: R3.2 SJ2.1
N$25
  Top 0.254: R43.2 C27.1 R44.1
N$26  (via drill 0.33)
  Top 0.254: C28.1 96.52,37 | 96.52,37 R44.2 | U11.3 93.22,48.77 v93.73,48.26 | v93.73,40.64 94.49,39.88 96.01,39.88 96.52,39.37 96.52,37
  Bottom 0.254: v93.73,48.26 v93.73,40.64
N$27  (via drill 0.33)
  Top 0.254: C27.2 93.22,37.08 92.46,37.85 90.17,37.85 89.66,38.35 89.66,42.51 R47.1 90.34,44.28 90.17,44.45 v89.92,44.45 | U11.2 U11.1 90.68,47.24 v89.92,46.48
  Bottom 0.254: v89.92,46.48 v89.92,44.45
N$28  (via drill 0.33)
  Top 0.254: C10.1 77.72,37 | 77.72,37 R14.2 | U9.3 73.91,48.77 v74.42,48.26 | v75.44,40.64 76.45,40.64 77.72,39.62 77.72,37
  Bottom 0.254: v74.42,48.26 74.42,41.66 v75.44,40.64
N$29  (via drill 0.33)
  Top 0.254: C9.2 74.42,37.08 73.66,37.85 71.12,37.85 70.61,38.35 70.61,42.25 R15.1 72.14,43.94 71.37,44.45 v71.12,44.45 | U9.2 U9.1 v71.37,47.5
  Bottom 0.254: v71.12,44.45 71.12,47.24 v71.37,47.5
N$31  (via drill 0.33)
  Top 0.254: C12.1 R16.2 77.72,43.78 v77.72,44.45 | v76.45,48.26 U9.5
  Bottom 0.254: v77.72,44.45 77.72,46.99 v76.45,48.26
N$32
  Top 0.254: C13.1 R18.2 76.62,63.5 75.95,63.5 75.18,64.26 73.15,64.26 72.3,63.41 R19.1
N$33
  Top 0.254: C15.1 R19.2 70.87,63.84 70.87,62.74 72.14,61.47 77.22,61.47 77.98,60.71 77.98,59.44 78.23,59.18 79.76,59.18 80.01,58.93 80.01,57.66 79.5,57.15 77.22,57.15 76.45,56.39 U9.10
N$34  (via drill 0.33)
  Top 0.254: U9.8 U9.9 77.72,53.34 76.45,52.07 72.9,52.07 v72.14,52.83 | v72.14,57.15 R20.1 70.36,60.11 70.36,64.77 71.63,66.04 75.18,66.04 75.69,65.53 75.69,64.52 75.95,64.26 78.23,64.26 78.99,65.02 C13.2
  Bottom 0.254: v72.14,57.15 v72.14,52.83
N$35
  Top 0.254: R21.1 C14.1 R20.2
N$36
  Top 0.254: C16.1 R21.2 76.71,58.17 73.91,55.37 U9.12
N$37
  Top 0.254: U8.4 42.48,48.16 R9.1
N$38
  Top 0.254: R53.1 C31.1 R52.2
N$39
  Top 0.254: R53.2 96.77,65.11 | 96.77,65.11 C33.1 | U11.10 95.76,56.39 96.52,57.15 98.3,57.15 98.81,57.66 98.81,58.93 98.55,59.18 97.03,59.18 96.77,59.44 96.77,65.11
N$40
  Top 0.254: U11.8 U11.9 97.03,53.09 96.01,52.07 91.44,52.07 89.66,53.85 89.66,57.15 90.84,58.33 R54.1 89.92,59.35 89.92,64.01 90.17,64.26 92.2,64.26 93.05,65.11 C31.2
N$41
  Top 0.254: R55.1 C32.1 R54.2
N$42
  Top 0.254: X13.1 95,71.97 R49.1
N$43
  Top 0.254: C34.1 R55.2 95.5,58.17 93.22,55.88 U11.12
N$44  (via drill 0.33)
  Top 0.254: C30.1 96.52,43.78 | 96.52,43.78 R48.2 | U11.5 v95.76,48.26 | v96.52,44.45 96.52,43.78
  Bottom 0.254: v95.76,48.26 96.52,47.5 v96.52,44.45
N$45
  Top 0.254: R17.1 R22.2 R23.2 78.99,67.4 R18.1
N$46
  Top 0.254: R47.2 C29.1 R48.1
N$47
  Top 0.254: X12.1 97.54,27.6 R41.1
N$48
  Top 0.254: R15.2 C11.1 R16.1
N$49  (via drill 0.33)
  Top 0.254: IC1.1 58.04,11.3 58.93,10.41 58.93,8.38 | 58.93,8.38 59.69,7.62 66.29,7.62 67.06,8.38 67.06,10.41 67.82,11.18 68.48,11.18 IC2.1 | SJ3.2 44.96,13.46 v48.26,10.16 | 58.93,8.38 v57.15,10.16
  Bottom 0.254: v48.26,10.16 v57.15,10.16
N$50
  Top 0.254: X10.1 88.65,27.09 R25.1
N$53
  Top 0.254: X8.1 79.76,28.87 R11.1
N$58
  Top 0.254: R39.2 R38.1
N$59
  Top 0.254: R42.2 R41.2 R40.1 R43.1
N$60
  Top 0.254: R46.2 R42.1
N$61
  Top 0.254: R50.2 R49.2 R45.1 R52.1
N$62
  Top 0.254: R50.1 R51.2
N$63
  Top 0.254: X11.1 86.11,72.48 R33.1
PA0/TIM5_CH1/ENC1_CHA  (via drill 0.33)
  Top 0.254: IC1.4 59.05,15.11 59.94,16 59.94,21.08 59.18,21.84 53.59,21.84 51.31,24.13 51.31,33.78 v52.07,34.54 | v55.37,36.83 65.53,36.83 68.33,39.62 68.33,43.69 62.23,49.78 62.23,66.55 EXT2.4
  Bottom 0.254: v52.07,34.54 53.09,34.54 v55.37,36.83
PA1/TIM5_CH2/ENC1_CHB  (via drill 0.33)
  Top 0.254: IC1.7 55.75,18.92 50.8,23.88 50.8,34.29 51.82,35.31 v52.83,35.31 | v58.93,37.59 65.53,37.59 67.82,39.88 67.82,43.43 59.69,51.56 59.69,66.55 EXT2.8
  Bottom 0.254: v52.83,35.31 55.12,37.59 v58.93,37.59
PA2/SPI1_ENC1_STA
  Top 0.254: U4.2 8.13,74.3 8.13,75.18 7.87,75.44 4.06,75.44 3.56,74.93 3.56,72.39 5.08,70.87 18.54,70.87 34.8,54.61 47.75,54.61 EXT2.7
PA3/SPI1_ENC2_NSS
  Top 0.254: EXT2.10 54.61,66.55 52.83,66.55 52.07,65.79 52.07,64.77 42.93,55.63 35.31,55.63 19.02,71.91 U5.5
PA4/SPI1_ENC1_NSS
  Top 0.254: U4.5 5.33,74.09 5.33,72.64 6.6,71.37 18.8,71.37 35.05,55.12 43.18,55.12 EXT2.11
PA5/SPI1_SCK  (via drill 0.33)
  Top 0.254: U7.4 46.99,74.14 46.99,75.18 46.74,75.44 39.12,75.44 37.85,74.17 37.85,71.88 37.08,71.12 34.54,71.12 33.5,72.16 U6.4 33.53,74.14 33.53,75.18 33.27,75.44 25.15,75.44 24.38,74.68 24.38,71.37 22.48,69.47 | U4.4 6.33,72.67 7.11,71.88 9.91,71.88 10.67,72.64 10.67,74.42 11.68,75.44 19.81,75.44 20.07,75.18 20.07,74.14 U5.4 20.04,71.91 22.48,69.47 | 57.15,41.15 61.47,41.15 62.23,41.91 62.23,44.96 57.06,50.13 IC3.23 | v39.37,56.39 35.56,56.39 22.48,69.47 | EXT1.18 57.15,41.15 | 57.15,41.15 57.15,42.93 56.39,43.69 v51.56,43.69
  Bottom 0.254: v39.37,56.39 39.37,50.29 46.23,43.94 51.31,43.94 v51.56,43.69
PA6/SPI1_MISO  (via drill 0.33)
  Top 0.254: IC3.9 49.98,49.73 49.53,49.28 49.53,42.93 | 49.53,42.93 49.53,41.15 EXT1.14 | U7.3 48.01,74.17 48.01,75.18 47.24,75.95 38.61,75.95 37.34,74.68 37.34,72.14 36.83,71.63 35.05,71.63 34.49,72.19 U6.3 34.54,74.17 34.54,75.18 33.78,75.95 24.89,75.95 23.88,74.93 23.88,71.88 v22.61,70.61 21.03,72.19 U5.3 21.08,74.17 21.08,75.18 20.32,75.95 11.43,75.95 10.16,74.68 10.16,72.9 9.65,72.39 7.62,72.39 7.32,72.69 U4.3 | v44.7,44.2 45.21,43.69 48.77,43.69 49.53,42.93 | v23.62,69.6 23.62,69.09 35.56,57.15 v38.61,57.15
  Bottom 0.254: v22.61,70.61 v23.62,69.6 | v44.7,44.2 38.61,50.04 v38.61,57.15
PA7/SPI1_MOSI
  Top 0.254: EXT1.22 62.23,41.15 64.01,41.15 64.77,41.91 64.77,43.18 57.42,50.53 IC3.24
PA10/SPI1_PWR  (via drill 0.33)
  Top 0.254: R6.1 11.94,59.44 14.22,57.15 21.59,57.15 30.23,48.51 v37.85,48.51 42.93,53.59 44.2,53.59 44.96,52.83 44.96,51.82 44.45,51.31 43.69,51.31 43.43,51.05 43.43,49.28 43.69,49.02 44.7,49.02 44.96,48.77 44.96,48.01 45.47,47.5 U8.2
  Bottom 0.254: EXT1.7 43.18,43.18 v37.85,48.51
PB0/SPI1_IMU_NSS
  Top 0.254: EXT1.21 60.96,45.47 56.7,49.73 IC3.22
PB1/SPI1_ENC2_STA  (via drill 0.33)
  Top 0.254: U5.2 v22.02,72.72 | EXT1.26 67.31,41.15 67.31,43.18 56.39,54.1 34.04,54.1 v21.34,66.8
  Bottom 0.254: v21.34,66.8 21.34,72.03 v22.02,72.72
PB6/USART1_TX/TIM4_CH1
  Top 0.254: 69.47,15.11 IC2.4 68.73,15.24 70.1,15.24 70.36,15.49 70.36,16.76 70.1,17.02 67.06,17.02 65.53,18.54 65.53,21.59 64.77,22.35 53.85,22.35 51.82,24.38 51.82,33.27 54.1,35.56 54.1,37.34 52.07,39.37 52.07,41.15 EXT1.13
PB6/USART1_TX/XPC_RS-485_D  (via drill 0.33)
  Top 0.254: 67.94,12.57 IC2.2 68.48,12.45 66.55,12.45 65.79,13.21 v65.79,15.49 | U2.4 38.15,25.65 v39.62,25.65
  Bottom 0.254: v65.79,15.49 65.79,16.26 65.02,17.02 48.26,17.02 v39.62,25.65
PB7/USART1_RX/TIM4_CH2
  Top 0.254: IC2.7 66.67,18.92 66.04,19.56 66.04,22.86 54.1,22.86 52.32,24.64 52.32,33.02 54.61,35.31 54.61,41.15 EXT1.15
PB7/USART1_RX/XPC_RS-485_R  (via drill 0.33)
  Top 0.254: 67.94,16.38 IC2.5 68.48,16.26 v64.52,16.26 | U2.1 v39.75,21.97
  Bottom 0.254: v64.52,16.26 48.26,16.26 42.55,21.97 v39.75,21.97
PB8/XPC_RS-485_DE  (via drill 0.33)
  Top 0.254: U2.2 37.21,23.24 36.83,23.62 36.83,24.13 37.08,24.38 37.9,24.38 U2.3 38.15,24.64 39.62,24.64 40.39,25.4 40.39,26.16 41.15,26.92 46.48,26.92 47.24,27.69 47.24,35.81 v48.01,36.58
  Bottom 0.254: v48.01,36.58 49.28,37.85 52.32,37.85 53.34,38.86 EXT1.16
PB9/FLYW_RS-485_DE  (via drill 0.33)
  Top 0.254: U1.2 46.1,23.24 45.72,23.62 45.72,24.13 45.97,24.38 46.79,24.38 U1.3 47.04,24.64 47.75,24.64 48.51,25.4 48.51,35.05 49.28,35.81 v49.28,36.83
  Bottom 0.254: v49.28,36.83 49.78,37.34 52.58,37.34 54.61,39.37 54.61,40.39 55.88,41.4 EXT1.17
PB10/USART3_TX/FLYW_RS-485_D  (via drill 0.33)
  Top 0.254: U1.4 47.04,25.91 47.75,25.91 48.01,26.16 v48.01,35.56 | EXT2.14 49.53,66.55 49.53,63.5 v42.42,56.39
  Bottom 0.254: v42.42,56.39 42.42,50.8 47.75,45.97 56.9,45.97 59.69,42.93 59.69,39.37 58.42,38.1 54.86,38.1 53.09,36.32 51.31,36.32 51.05,36.07 48.51,36.07 v48.01,35.56
PB11/USART3_TX/FLYW_RS-485_R  (via drill 0.33)
  Top 0.254: U1.1 47.04,22.1 47.75,22.1 49.02,23.37 49.02,34.8 50.29,36.07 v50.29,36.58 | v41.66,57.15 48.26,63.75 EXT2.15
  Bottom 0.254: v41.66,57.15 41.66,50.8 47.24,45.47 55.88,45.47 57.15,43.94 57.15,39.12 56.64,38.61 54.61,38.61 52.83,36.83 50.55,36.83 v50.29,36.58
PC0/ADC10/M1_CURRENT  (via drill 0.33)
  Top 0.254: EXT1.19 v59.94,43.94 | v76.96,51.56 77.72,50.8 U9.6 | C11.2 74.51,43.78 75.18,44.45 v75.44,44.45 | U9.6 U9.7 | v76.45,46.48 77.72,47.75 U9.6
  Bottom 0.254: v59.94,43.94 65.28,43.94 72.9,51.56 v76.96,51.56 | v75.44,44.45 76.45,45.47 v76.45,46.48
PC1/ADC11/M2_CURRENT  (via drill 0.33)
  Top 0.254: EXT1.20 59.94,38.35 v64.77,38.35 | v70.36,46.74 70.36,53.09 71.37,54.1 U9.14 U9.13 72.64,56.39 74.42,58.17 C14.2
  Bottom 0.254: v64.77,38.35 66.8,38.35 70.36,41.91 v70.36,46.74
PC2/ADC12/RIDER_TORQUE  (via drill 0.33)
  Top 0.254: U10.6 87.38,47.75 v86.11,46.48 | U10.7 U10.6 | v84.84,44.45 84.58,44.45 83.91,43.78 C20.2 | v87.38,51.82 U10.6
  Bottom 0.254: v84.84,44.45 86.11,45.72 v86.11,46.48 | v87.38,51.82 87.38,53.09 68.58,71.88 65.28,71.88 JP1.3
PC2/SPI1_ENC3_NSS
  Top 0.254: JP1.1 54.1,73.91 50.55,70.36 34.29,70.36 32.51,72.14 32.51,74.09 U6.5
PC2/SPI1_ENC3_NSS/ADC12
  Bottom 0.254: JP1.2 60.71,73.15 EXT2.2
PC3/ADC13/PEDAL_SPEED  (via drill 0.33)
  Top 0.254: U10.14 U10.13 v82.3,56.64 83.57,57.91 83.57,58.17 83.73,58.33 | C23.2 83.73,58.33 | 83.73,58.33 83.82,58.24
  Bottom 0.254: JP2.1 61.98,75.44 61.98,72.64 63.25,71.37 68.33,71.37 82.3,57.4 v82.3,56.64
PC3/SPI1_ENC3_STA  (via drill 0.33)
  Top 0.254: v38.35,71.12 50.55,71.12 53.85,74.42 55.88,74.42 JP2.3 | v35.56,72.64 35.56,74.04 U6.2
  Bottom 0.254: v38.35,71.12 37.08,71.12 v35.56,72.64
PC3/SPI1_ENC3_STA/ADC13
  Bottom 0.254: EXT2.9 57.15,66.55 57.15,70.61 59.44,72.9 59.44,75.44 JP2.2
PC4/ADC14/FRONT_WHEEL_SPEED  (via drill 0.33)
  Top 0.254: U11.7 U11.6 | U11.6 97.03,47.24 93.56,43.78 C29.2 | v89.66,51.56 96.77,51.56 97.03,51.31 U11.6
  Bottom 0.254: JP3.3 71.37,69.85 v89.66,51.56
PC4/SPI1_ENC4_NSS
  Top 0.254: JP3.1 65.02,75.18 65.02,77.72 64.26,78.49 57.15,78.49 50.55,71.88 46.74,71.88 45.97,72.64 45.97,74.09 U7.5
PC4/SPI1_ENC4_NSS/ADC14
  Top 0.254: JP3.2 68.83,73.15 67.06,71.37 56.9,71.37 EXT2.12
PC5/ADC15/REAR_WHEEL_SPEED  (via drill 0.33)
  Top 0.254: U11.13 U11.14 v90.68,56.64 91.44,56.64 92.71,57.91 C32.2
  Bottom 0.254: JP4.1 72.39,75.69 72.39,69.6 85.34,56.64 v90.68,56.64
PC5/SPI1_ENC4_STA
  Top 0.254: U7.2 49.02,74.04 49.02,72.9 49.28,72.64 50.55,72.64 56.9,78.99 64.52,78.99 66.29,77.47 JP4.3
PC5/SPI1_ENC4_STA/ADC15
  Top 0.254: EXT2.13 52.07,66.55 52.07,68.58 55.37,71.88 66.8,71.88 67.56,72.64 67.56,75.44 JP4.2
PC6/TIM3_CH1/ENC2_CHA  (via drill 0.33)
  Top 0.254: IC1.9 51.16,20.32 50.55,20.32 50.29,20.57 50.29,34.54 51.82,36.07 v51.82,38.61 | EXT2.20 41.91,66.55 41.91,58.42 40.89,57.4 v40.89,56.39
  Bottom 0.254: v40.89,56.39 40.89,50.55 46.99,44.96 53.59,44.96 54.61,43.94 54.61,41.91 53.85,41.15 52.83,41.15 52.07,40.39 52.07,38.86 v51.82,38.61
PC7/TIM3_CH2/ENC2_CHB  (via drill 0.33)
  Top 0.254: IC1.12 49.91,16.38 49.28,17.02 49.28,19.05 49.78,19.56 49.78,34.8 51.05,36.07 51.05,37.08 v49.53,38.61 | EXT2.21 40.64,58.17 40.13,57.66 v40.13,57.15
  Bottom 0.254: v40.13,57.15 40.13,50.8 46.48,44.45 52.83,44.45 53.09,44.2 53.09,43.94 52.07,42.93 52.07,41.91 51.31,41.15 50.04,41.15 49.53,40.64 v49.53,38.61
PC8/SD_D0  (via drill 0.33)
  Top 0.254: X14.7 16.43,40.81 17.78,42.16 v17.78,45.47 R57.1 | EXT2.22 39.37,66.55 39.37,64.77 35.31,60.71 v33.27,60.71
  Bottom 0.254: v17.78,45.47 26.69,54.12 27.71,55.12 30.48,57.9 v33.27,60.71
PC9/SD_D1  (via drill 0.33)
  Top 0.254: X14.8 v15.77,42.44 | v20.32,46.99 R58.1 | EXT2.24 36.83,66.55 36.83,63.5 v34.8,61.47
  Bottom 0.254: v15.77,42.44 v20.32,46.99 v34.8,61.47
PC10/SD_D2
  Top 0.254: X14.9 11.48,23.62 11.18,23.62 8.38,26.42 8.38,41.91 13.21,46.74 13.21,48.26 14.48,49.53 21.84,49.53 22.69,48.68 R59.1 22.86,45.47 30.23,38.1 36.07,38.1 36.58,38.61 41.91,38.61 EXT1.8
PC11/SD_D3
  Top 0.254: X14.1 12.85,25.91 11.18,25.91 8.89,28.19 8.89,37.08 | 15.24,48.77 R56.1 15.24,48.51 15.24,48.01 8.89,41.66 8.89,37.08 | 8.89,37.08 35.81,37.08 36.83,38.1 43.94,38.1 44.45,38.61 44.45,41.15 EXT1.9
PC12/SD_CLK
  Top 0.254: X14.5 35.3,35.81 37.08,37.59 44.7,37.59 45.72,38.61 EXT1.10
PD2/SD_CMD
  Top 0.254: X14.2 28.57,28.31 37.34,37.08 45.47,37.08 46.99,38.61 46.99,41.15 EXT1.11
PEDAL_ENC_A
  Top 0.254: X4.3 83.06,6.6 80.01,9.65 75.95,9.65 72.9,12.7 72.9,13.46 72.64,13.72 68.73,13.72 IC2.3
PEDAL_ENC_B
  Top 0.254: X4.2 85.6,6.6 82.04,10.16 76.2,10.16 73.41,12.95 73.41,17.02 72.9,17.53 68.73,17.53 IC2.6
REAR_WHEEL_ENC_A
  Top 0.254: X5.3 69.34,5.08 67.56,6.6 57.4,6.6 54.36,9.65 54.36,16.76 55.12,17.53 57.3,17.53 IC1.6
REAR_WHEEL_ENC_B
  Top 0.254: X5.2 71.88,5.08 70.1,7.11 57.66,7.11 54.86,9.91 54.86,12.95 55.63,13.72 57.3,13.72 IC1.3
XPC_RS-485_A
  Top 0.254: SJ2.2 41.66,29.21 40.89,29.97 37.59,29.97 36.83,30.73 36.83,32 36.58,32.26 35.31,32.26 34.8,31.75 34.8,25.4 34.04,24.64 33.22,24.64 U2.6 32.97,24.38 29.72,24.38 26.16,20.83 26.16,15.24 19.56,8.64 X2.5
XPC_RS-485_B
  Top 0.254: R3.1 35.98,28.7 35.31,28.19 35.31,24.64 33.91,23.24 U2.7 32.97,23.11 29.21,23.11 26.92,20.83 26.92,14.48 X2.4

## Text on the board
tPlace: JP2 | JP4 | SPI1 ENC1 | U4 | SPI1 ENC2 | U5 | SPI1 ENC3 | U6 | SPI1 ENC4 | U7 | JP1 | JP3 | X9 ADC11 | X11 ADC13 | X13 ADC15 | 2 | 1 | EXT2 | SELECT: SPI ENC3,4 | STM32-H405 BUT JUMPER / MUST BE DISCONNECTED | x4 | ADC12-15 | COMPASS | X | Y | ACC/GYRO | Y | X | X14 | EXT1 | EXT1 | 1 | 2 | CONNECT SJ1,SJ2 / IF 120R TERM / NEEDED FOR X1,X2 | SJ1 | SJ2 | X8 ADC10 | X10 ADC12 | X12 ADC14 | GND | SIG | BKUP INCR ENC | SELECT: | BKUP ENC+X2 | SJ3 | 2B+ | 2B- | 2A+ | 2A- | 1B+ | 1B- | 1A+ | 1A- | X3 | GND | X4, X5, X6 | +5V | X7 | X2 USART1/XPC | X1 USART3/FLYW | TIM3 | TIM5 | X6 TIM3 | X5 TIM5 | X4 TIM4 | GND | A | B | +5V